# EAGLE board board for project (EAGLE 9.2.2)
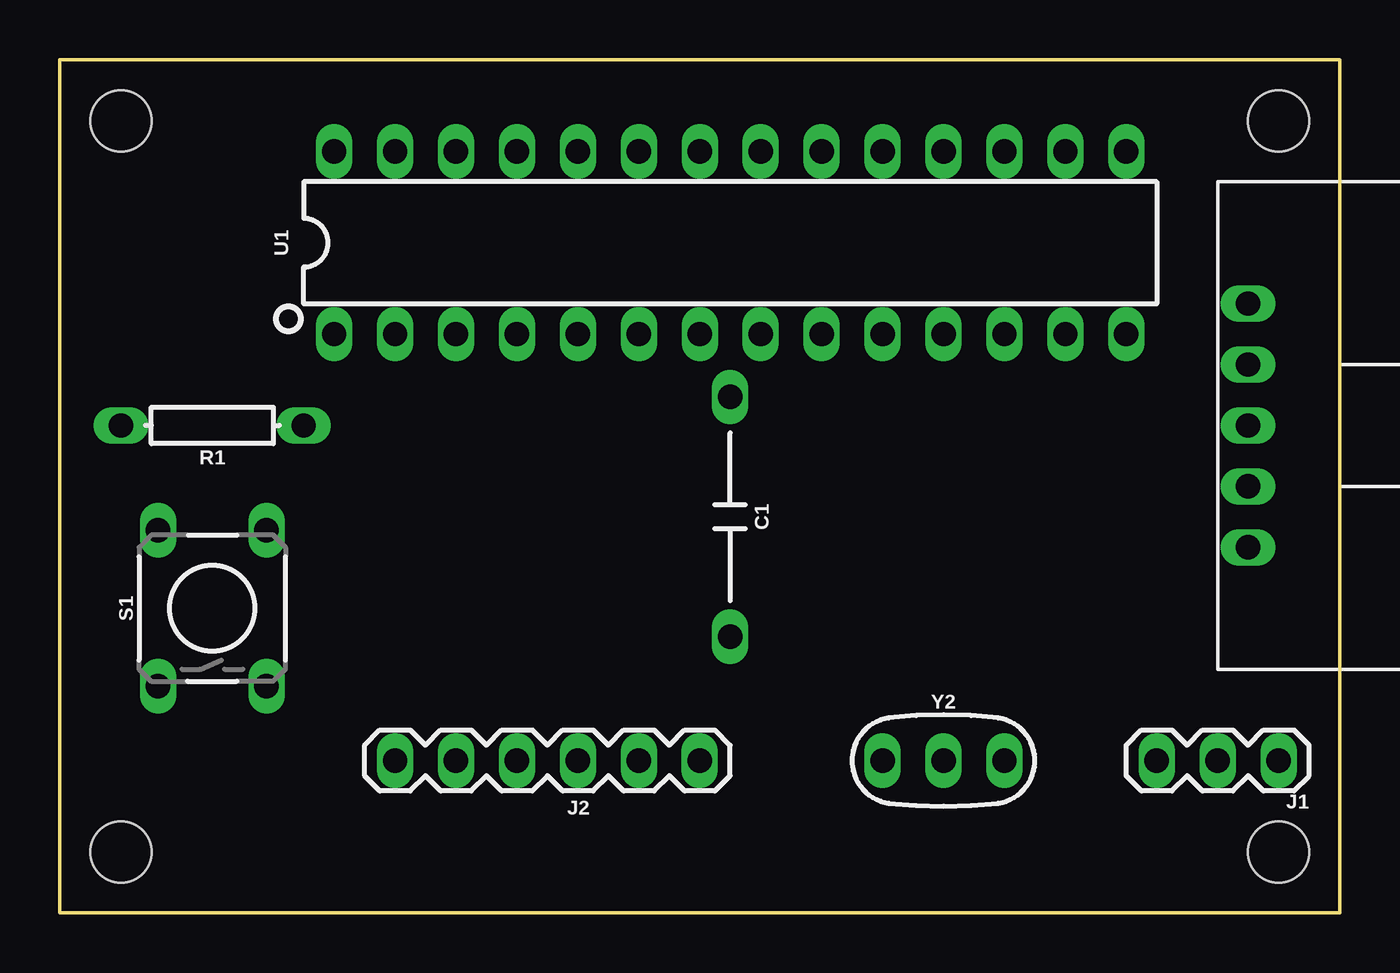
[diagram p0: board, top side]
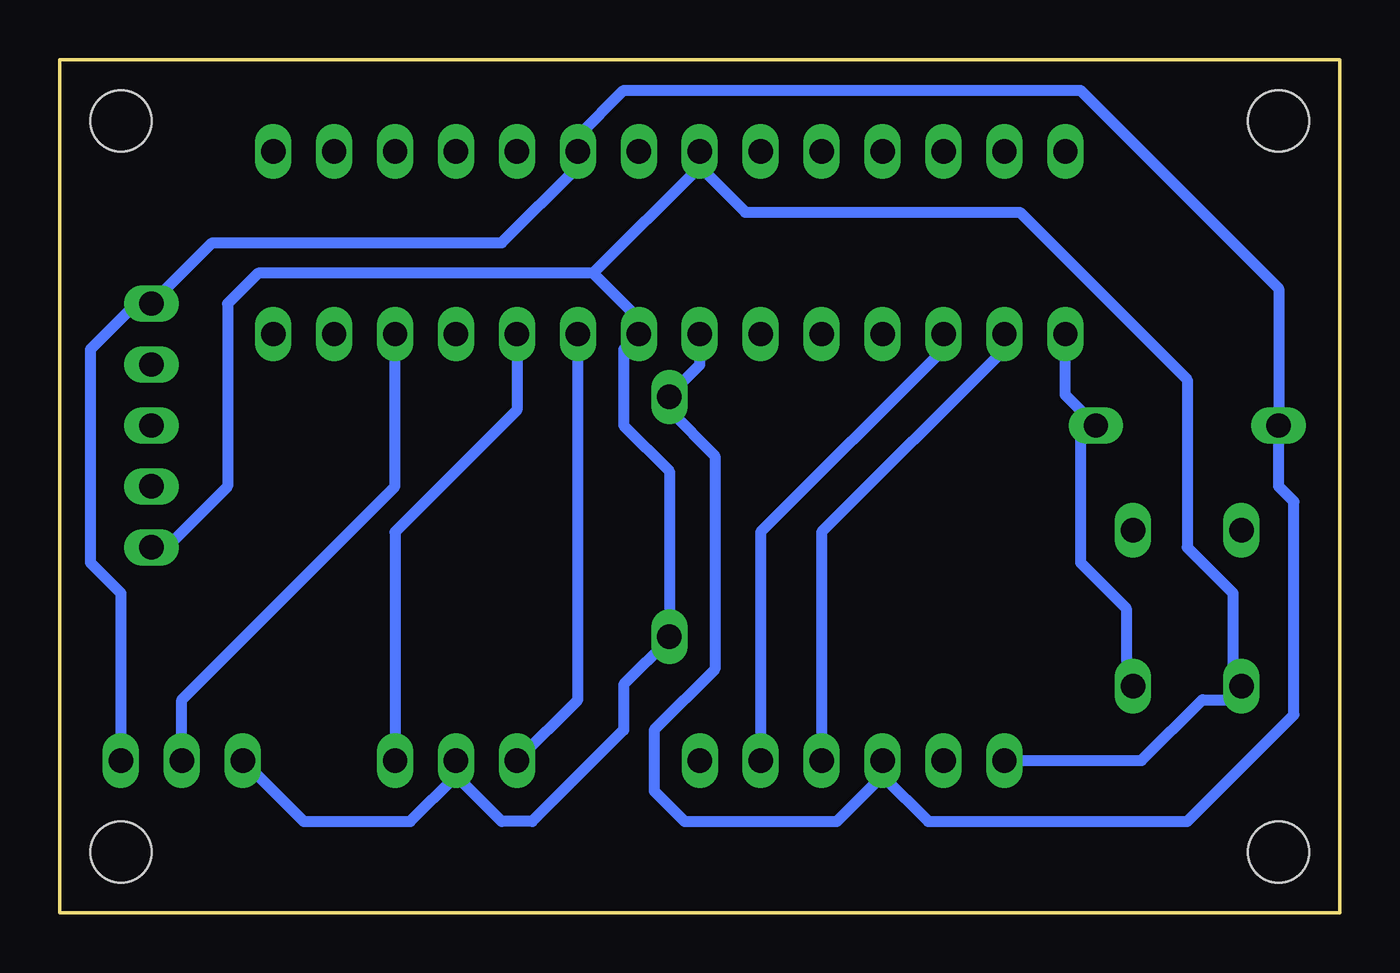
[diagram p1: board, bottom side, seen from below]

Size 53.34 x 35.56 mm. Coordinates in mm from the lower left corner, seen from the top.
Outline: 53.34,35.56 53.34,0 0,0 0,35.56 53.34,35.56
Copper layers (1*16): Top 0.035mm / dielectric 1.5mm / Bottom 0.035mm
Design rules "OthermillDRC_1_32_v2": minimum track width 8mil, minimum drill 0.8mm, track to track 0.794003125mm, track to pad 0.794003125mm, pad to pad 0.794003125mm, via to via 0.794003125mm, smd to smd 0mil, copper to edge 0mil, drill to drill 1mil, minimum pad ring 10mil, minimum via ring 10mil, stop-mask expansion 1mil, vias tented up to drill 30mil, thermal gap 10mil
Net classes: 0 default: width 0.457 mm, drill 0.457 mm, clearance 0.457 mm
Holes 2.54 mm at 2.54,33.02 2.54,2.54 50.8,2.54 50.8,33.02

## Footprints (pad centres in the part's own frame; a part is rotated, then mirrored left to right if it is on the bottom)
CAP-PTH-10MM = drill 1.016 long: 1 -5,0; 2 5,0
1X03 = drill 1.016 long: 1 0,0; 2 2.54,0; 3 5.08,0
FTDI_BASIC = drill 1.016 long: CTS 10.16,0; DTR 0,0; GND 12.7,0; RXI 2.54,0; TXO 5.08,0; VCC 7.62,0
AXIAL-0.3 = drill 1.016 long: P$1 -3.81,0; P$2 3.81,0
TACTILE_SWITCH_PTH_6.0MM = drill 1.016 long: 1 -3.251,2.261; 2 3.251,2.261; 3 -3.251,-2.261; 4 3.251,-2.261
DIP28 = drill 1.016 long: 1 -16.51,-3.81; 2 -13.97,-3.81; 3 -11.43,-3.81; 4 -8.89,-3.81; 5 -6.35,-3.81; 6 -3.81,-3.81; 7 -1.27,-3.81; 8 1.27,-3.81; 9 3.81,-3.81; 10 6.35,-3.81; 11 8.89,-3.81; 12 11.43,-3.81; 13 13.97,-3.81; 14 16.51,-3.81; 15 16.51,3.81; 16 13.97,3.81; 17 11.43,3.81; 18 8.89,3.81; 19 6.35,3.81; 20 3.81,3.81; 21 1.27,3.81; 22 -1.27,3.81; 23 -3.81,3.81; 24 -6.35,3.81; 25 -8.89,3.81; 26 -11.43,3.81; 27 -13.97,3.81; 28 -16.51,3.81
USB = drill 1.016 long: 1 5.08,8.89; 2 7.62,8.89; 3 10.16,8.89; 4 12.7,8.89; 5 15.24,8.89
RESONATOR-PTH-7.6X3.8 = drill 1.016 long: 1 -2.54,0; 2 0,0; 3 2.54,0

## Placement (x,y rotation side)
C1  10nF  [CAP-PTH-10MM]  27.94,16.51 270 top
FRAME1  FRAME-LETTER  [CREATIVE_COMMONS]  -140.97,6.35 0 top  (outside the outline)
J1  [1X03]  50.8,6.35 180 top
J2  6_PIN_SERIAL_CABLEPTH  [FTDI_BASIC]  26.67,6.35 180 top
R1  100  [AXIAL-0.3]  6.35,20.32 180 top
S1  MOMENTARY-SWITCH-SPST-PTH-6.0MM  [TACTILE_SWITCH_PTH_6.0MM]  6.35,12.7 90 top
U1  328P  [DIP28]  27.94,27.94 0 top
U$1  USBPORT  [USB]  58.42,10.16 90 top
Y2  [RESONATOR-PTH-7.6X3.8]  36.83,6.35 0 top

## Library data of the parts
C1 = library eagle; PROD_ID: CAP-09321
FRAME1 = SparkFun-Aesthetics
J1 J2 U$1 Y2 = library eagle
R1 = library eagle; PROD_ID: RES-12181
S1 = library eagle; PROD_ID: SWCH-08441; SF_SKU: COM-00097
U1 = library eagle; PROD_ID: IC-09136

## Nets
5V: C1.1 J1.1 J2.VCC R1.P$2 U1.7 U1.20 U$1.5
GND: C1.2 J1.3 J2.GND S1.1 U1.8 U1.22 U$1.1 Y2.2
N$1: R1.P$1 S1.3 U1.1
N$2: J1.2 U1.12
N$3: U1.9 Y2.1
N$4: U1.10 Y2.3
N$6: J2.RXI U1.3
N$7: J2.TXO U1.2

## Tracks (layer width: path | path; a pad name or v marks a point on that pad's centre or on a via)
5V
  Bottom 0.457: 19.05,5.71 20.96,3.81 27.3,3.81 28.57,5.08 28.57,7.62 26.04,10.16 26.04,19.05 27.94,20.96 C1.1 27.94,21.59 26.67,22.86 U1.7 | 19.05,5.71 17.15,3.81 6.35,3.81 1.91,8.25 1.91,17.14 2.54,17.78 R1.P$2 2.54,26.04 10.79,34.29 29.85,34.29 31.75,32.39 U1.20 31.75,31.11 34.93,27.94 46.99,27.94 U$1.5 50.16,25.4 52.07,23.5 52.07,14.61 50.8,13.33 J1.1 | 19.05,5.71 J2.VCC
GND
  Bottom 0.457: J2.GND 8.26,6.35 5.71,8.89 4.45,8.89 S1.1 4.45,9.52 4.45,13.33 6.35,15.24 6.35,22.22 13.34,29.21 24.76,29.21 26.67,31.11 | 36.83,5.71 38.73,3.81 43.18,3.81 J1.3 | U$1.1 48.9,15.24 46.35,17.78 46.35,25.4 45.09,26.67 31.12,26.67 | 31.12,26.67 29.21,24.76 U1.8 29.85,23.5 29.85,20.32 27.94,18.42 C1.2 27.94,11.43 29.85,9.52 29.85,7.62 33.65,3.81 34.93,3.81 36.83,5.71 | 31.12,26.67 26.67,31.11 | 36.83,5.71 Y2.2 | 26.67,31.11 U1.22
N$1
  Bottom 0.457: S1.3 8.89,9.52 8.89,12.7 10.79,14.61 10.79,19.68 R1.P$1 11.43,21.59 U1.1
N$2
  Bottom 0.457: U1.12 39.37,17.78 48.26,8.89 J1.2
N$3
  Bottom 0.457: U1.9 31.75,8.89 Y2.1
N$4
  Bottom 0.457: Y2.3 39.37,15.87 34.29,20.96 U1.10
N$6
  Bottom 0.457: J2.RXI 24.13,15.87 16.51,23.5 U1.3
N$7
  Bottom 0.457: J2.TXO 21.59,15.87 13.97,23.5 U1.2